# EAGLE board trabalho_arduino (EAGLE 9.7.0)

Size 171.47 x 85.52 mm. Coordinates in mm from the lower left corner, seen from the top.
Outline: 0,0 171.47,0 171.47,85.52 0,85.52 0,0
Copper layers (1*16): Top 0.035mm / dielectric 1.5mm / Bottom 0.035mm
Design rules "default": minimum track width 6mil, minimum drill 0.35mm, track to track 6mil, track to pad 6mil, pad to pad 6mil, via to via 6mil, smd to smd 6mil, copper to edge 40mil, drill to drill 6mil, minimum pad ring 10mil, minimum via ring 8mil, stop-mask expansion 4mil, vias tented up to drill 0mil, thermal gap 10mil

## Footprints (pad centres in the part's own frame; a part is rotated, then mirrored left to right if it is on the bottom)
BATTERY-GENERIC = drill 1.118 pad 3.15 octagon: + 2.54,0; - -2.54,0
DIODE-AXIAL = drill 1: 1 -5.08,0; 2 5.08,0
LU-5-R = drill 0.8: 1 -6.35,-3.81; 5 3.81,-3.81; 6 6.35,-3.81; 7 6.35,3.81; 8 3.81,3.81; 12 -6.35,3.81
MOTOR = drill 1.118 pad 3.15 octagon: + 2.54,0; - -2.54,0
ARDUINO-UNO-R3-SHIELD = drill 1.016 pad 1.88: 3.3V 24.13,-2.54; 5V 24.13,0; A0 24.13,12.7; A1 24.13,15.24; A2 24.13,17.78; A3 24.13,20.32; A4 24.13,22.86; A5 24.13,25.4; AREF -24.13,-13.97; D2 -24.13,20.32; D3 -24.13,17.78; D4 -24.13,15.24; D5 -24.13,12.7; D6 -24.13,10.16; D7 -24.13,7.62; D8 -24.13,3.81; D9 -24.13,1.27; D10 -24.13,-1.27; D11 -24.13,-3.81; D12 -24.13,-6.35; D13 -24.13,-8.89; GND@0 24.13,2.54; GND@1 24.13,5.08; GND@2 -24.13,-11.43; IOREF 24.13,-7.62; NC 24.13,-10.16; RES 24.13,-5.08; RX -24.13,25.4; SCL -24.13,-19.05; SDA -24.13,-16.51; TX -24.13,22.86; VIN 24.13,7.62
TO92 = drill 0.813 octagon: 1 -1.27,0; 2 0,1.905; 3 1.27,0

## Placement (x,y rotation side)
BAT1  9V  [BATTERY-GENERIC]  143.53,77.26 0 top
D1  DIODEDIODE-AXIAL  [DIODE-AXIAL]  117.12,31.49 90 top
K1  RELAY-SPDT_LU-5-R  [LU-5-R]  128.55,32.76 180 top
M1  MOTOR_HDR  [MOTOR]  114.83,74.77 0 top
U1  ARDUINO-UNO-R3-SHIELD  [ARDUINO-UNO-R3-SHIELD]  47.88,29.84 270 top
U2  TMP36GT9Z_TO92  [TO92]  165.38,28.95 0 top

## Library data of the parts
BAT1 D1 K1 M1 U1 U2 = Tinkercad

## Nets
BAT1+: BAT1.+ K1.1 K1.12
BAT1-: BAT1.- D1.1 K1.8 M1.- U1.GND@0 U1.GND@1 U1.GND@2 U2.1
M1_+: K1.6 M1.+
U1_5V: U1.5V U2.3
U1_A0: U1.A0 U2.2
U1_D13: D1.2 K1.5 U1.D13

## Tracks (layer width: path | path; a pad name or v marks a point on that pad's centre or on a via)
BAT1+  (2 unrouted)
BAT1-  (7 unrouted)
M1_+  (1 unrouted)
U1_5V  (1 unrouted)
U1_A0  (1 unrouted)
U1_D13  (2 unrouted)